# Altium PCB BH1730FVC_panel_with_PT1000_PCB.PcbDoc
Units mm, origin at the board's own origin, x right, y up, seen from the top; angles counter-clockwise.
Board outline 6.75 x 19.5 mm, 2 copper layers (Top Layer, Bottom Layer), stack 1.571 mm thick; 6 components, 9 nets, 36 pads, 12 vias.
Unrouted connection lines stored in the file: 3.
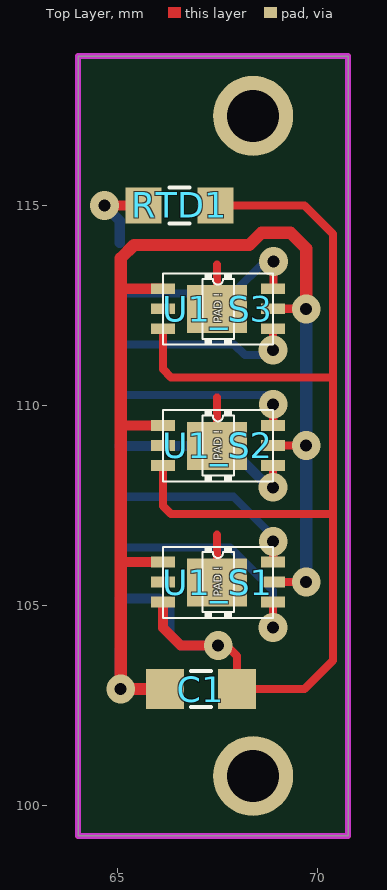
[diagram p0: Top Layer view]
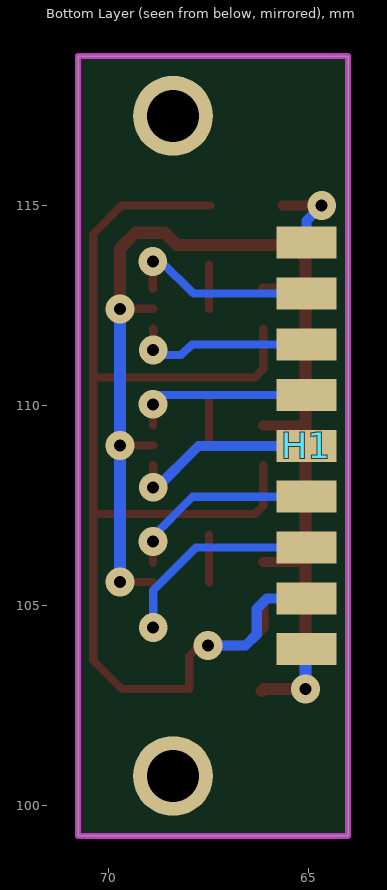
[diagram p1: Bottom Layer view, seen from below]

## Layer stack, top to bottom
Top Layer: signal copper 0.0356
Dielectric 1: core 1.5, FR-4, Dk 4.2
Bottom Layer: signal copper 0.0356

## Board outline
64.008,99.251 64.008,118.748 70.761,118.748 70.761,99.251

## Design rules (kind name [scope] priority, off if disabled: settings)
Clearance [(OnLayer('Bottom Layer') OR OnLayer('Top Layer'))] p1: gap=0.203
Clearance Clearance_1 [IsVia] p2: gap=0
PolygonConnect [All] p1: connectstyle=Relief reliefconductorwidth=0.254 reliefentries=4 polygonreliefangle="90 Angle" airgapwidth=0.254
RoutingVias [All] p1: holewidth=0.305 width=0.711 viastyle="Through Hole" minholewidth=0.305 minwidth=0.711 maxholewidth=0.305 maxwidth=0.711
SolderMaskExpansion [All] p1: expansion=0.102
Width [All] p1: maxlimit=2.54 minlimit=0.203 preferedwidth=0.254 checkconnectedcopper=TRUE
30 further rules are at their usual default settings.

## Classes and differential pairs
net class SCL[1..3]: SCL1 SCL2 SCL3
net class SDA[1..3]: SDA1 SDA2 SDA3
component class S3: U1_S3
component class S2: U1_S2
component class S1: U1_S1
component class BH1730FVC_top: C1 H1 RTD1
channel class BH1730FVC_sensor: S1 S2 S3

## Components (designator, comment, footprint, x,y, rotation, side; value= is the part's Value field where it differs from the comment)
C1 "100n/50V" SMD_Capacitor_0603 67.081,102.921 r0 top
H1 "9x_Wire_AWG-26_SMD" Wire_AWG-26_x9_SMD 65.049,103.92 r90 bottom
RTD1 "1k" SMD_Resistor_0603 66.55,115.011 r0 top
U1_S1 "BH1730FVC" WSOF6 66.132,106.096 r0 top (schematic designator U1)
U1_S2 "BH1730FVC" WSOF6 66.132,109.512 r0 top (schematic designator U1)
U1_S3 "BH1730FVC" WSOF6 66.132,112.928 r0 top (schematic designator U1)

## Footprints (in the part's own frame and the unit in brackets; to place one, negate y for a bottom-side part, rotate by r counter-clockwise, add the part's x,y. Pads: shape width x height; smd on the part's side, far side on the other; paste and mask are expansions set on the pad)
SMD_Capacitor_0603 [mm] "SMD Capacitor, Inch 0603, Metric 1608."
  rect 0.95x1 smd: 1(-0.9,0) 2(0.9,0)
  silkscreen extent -0.25,-0.45 0.25,0.45, body extent -0.8,-0.4 0.8,0.4, height 0.3
SMD_Resistor_0603 [mm] "SMD Resistor, Inch 0603, Metric 1608."
  rect 0.9x0.9 smd: 1(-0.9,0) 2(0.9,0)
  silkscreen extent -0.25,-0.45 0.25,0.45, body extent -0.8,-0.45 0.8,0.45, height 0.5
Wire_AWG-26_x9_SMD [mm] "9 x SMD pads for an AWG-26 wire with stress relief, pitch 1.27mm."
  rect 0.8x1.5 smd: 1(0,0) 2(1.27,0) 3(2.54,0) 4(3.81,0) 5(5.08,0) 6(6.35,0) 7(7.62,0) 8(8.89,0) 9(10.16,0)
  body extent -0.36,-0.64 10.5,4.44, height 0.55
WSOF6 [mm]
  rect 0.6x0.27 smd: 1(0,0) 2(0,-0.5) 3(0,-1) 4(2.75,-1) 5(2.75,-0.5) 6(2.75,0)
  rect 1.5x1.2 smd: DNC(1.353,-0.508)
  silkscreen extent 0,-1.4 2.75,0.38, body extent 0,-1.4 2.75,0.38, height 0.75

## Part data
C1: library part Cer_C0603T104K5RALTU, "Ceramic Cap Kemet COTS 100n/50V X7R 0603"
H1: library part Wire_AWG-26_x9_SMD_1, "9 x SMD pads for an AWG-26 wire with stress relief, pitch 1.27mm."
RTD1: library part PTS060301B100RP100, "PT1000 Vishay PTS060301B100RP100"
U1_S1 U1_S2 U1_S3: "Digital 16bit Serial Output Type  Ambient Light Sensor IC"

## Free pads (board coordinates)
  round 2 hole 1.3: 0(68.387,100.75) 0(68.387,117.254)

## Via types
v1: diameter 0.72, hole 0.3, Top Layer to Bottom Layer, tented both sides, 12 vias

## Nets (pads, with @x,y where several pads share a name; then routed paths per layer and width w, separated by ;. In a path a pad name is that pad's centre, name@x,y a point inside that pad or via, vN(x,y) a via of type N, cw(c..) or ccw(c..) an arc to the next point about the centre after c; other vN are vias at no path point)
3V3-DIG: C1.1 H1.1 U1_S1.1 U1_S1.5 U1_S2.1 U1_S2.5 U1_S3.1 U1_S3.5 | length 32.4
  Top Layer w0.203: U1_S1.5 v1@69.85,105.596 ; U1_S2.5 v1@69.871,109.012 ; U1_S3.5 v1@69.821,112.428
  Top Layer w0.254: 65.075,106.096 U1_S1.1 ; 65.075,112.903 65.1,112.928 U1_S3.1 ; 65.113,109.512 U1_S2.1
  Top Layer w0.305: C1.1@66.167,102.87 66.116,102.921 v1(65.075,102.921) 65.075,106.096 65.075,112.903 65.075,113.69 65.405,114.021 68.287,114.021 68.596,114.33 69.319,114.33 69.713,113.935 v1(69.713,112.427)
  Bottom Layer w0.203: H1.1 H1.1@65.075,103.895 ; v1@69.85,105.588 v1@69.85,105.596
  Bottom Layer w0.305: v1(65.075,102.921) H1.1@65.075,103.895 ; v1(69.713,105.596) v1@69.713,112.446
  other v1: 69.713,109.012
GND-DIG: C1.2 H1.2 RTD1.2 U1_S1.3 U1_S1.DNC U1_S2.3 U1_S2.DNC U1_S3.3 U1_S3.DNC | length 38.1
  Top Layer w0.203: U1_S2.3 66.132,107.503 66.335,107.299 70.371,107.299 ; 66.132,111.503 U1_S3.3 66.132,110.919 66.335,110.716 70.355,110.716 ; RTD1.2 69.672,115.011 70.38,114.303 70.38,103.632 69.669,102.921 C1.2 67.981,103.748 67.716,104.013 v1(67.513,104.013) ; U1_S1.DNC 67.485,106.779 ; U1_S2.DNC 67.485,110.211 ; U1_S3.DNC 67.485,113.535
  Top Layer w0.254: U1_S1.3 66.132,104.455 66.573,104.013 v1(67.513,104.013)
  Bottom Layer w0.254: H1.2 66.031,105.19 66.294,104.927 66.294,104.292 66.573,104.013 v1(67.513,104.013)
PT1000: H1.9 RTD1.1 | length 2.1
  Top Layer w0.254: v1(64.668,115.011) RTD1.1
  Bottom Layer w0.254: v1(64.668,115.011) 65.049,114.63 H1.9
SCL1: H1.4 U1_S1.6 | length 4.9
  Top Layer w0.203: U1_S1.6@68.888,106.08 v1@68.888,106.739
  Bottom Layer w0.203: H1.4 67.897,107.73 v1@68.888,106.739
  other v1: 68.888,106.612
SCL2: H1.6 U1_S2.6 | length 4.6
  Top Layer w0.203: U1_S2.6@68.888,109.509 v1@68.888,110.168
  Bottom Layer w0.203: H1.6 68.719,110.27 68.854,110.134 v1@68.888,110.168
  other v1: 68.888,110.041
SCL3: H1.8 U1_S3.6 | length 4.9
  Top Layer w0.203: U1_S3.6 68.892,112.939 v1(68.892,113.614)
  Bottom Layer w0.203: H1.8 67.877,112.81 68.707,113.64 68.732,113.614 v1(68.892,113.614)
SDA1: H1.3 U1_S1.4 | length 5.9
  Top Layer w0.203: v1(68.882,104.462) U1_S1.4 U1_S1.4@68.882,105.121
  Bottom Layer w0.203: H1.3 67.809,106.46 68.882,105.388 v1(68.882,104.462)
SDA2: H1.5 U1_S2.4 | length 4.9
  Top Layer w0.203: v1@68.882,107.866 U1_S2.4 U1_S2.4@68.882,108.525
  Bottom Layer w0.254: H1.5 67.747,109 v1@68.856,107.891
  other v1: 68.882,107.967
SDA3: H1.7 U1_S3.4 | length 4.6
  Top Layer w0.203: v1@68.882,111.269 U1_S3.4
  Bottom Layer w0.203: H1.7 67.911,111.54 68.182,111.269 v1@68.882,111.269
  other v1: 68.882,111.396
pads on no net: U1_S1.2 U1_S2.2 U1_S3.2

## Keep-outs
Keep-Out Layer:
  the board outline again, w0.152

## Dimensions
68.387,100.75 to 64.008,99.251 on Drill Guide
64.008,118.748 to 68.387,117.254 on Drill Guide
64.008,99.009 to 70.761,99.251 on Drill Guide
70.761,99.251 to 68.387,100.75 on Drill Guide
70.761,118.748 to 70.761,99.251 on Drill Guide

## Text inside footprints (layer, text, board x,y; h text height)
U1_S1: Top Overlay "PAD !" at 67.605,105.232 h0.2 r90
U1_S2: Top Overlay "PAD !" at 67.605,108.648 h0.2 r90
U1_S3: Top Overlay "PAD !" at 67.605,112.065 h0.2 r90